# Altium PCB ant_amplifier.PcbDoc
Units mm, origin at the board's own origin, x right, y up, seen from the top; angles counter-clockwise.
Board outline 58 x 30 mm, 2 copper layers (Top Layer, Bottom Layer), stack 1.571 mm thick; 25 components, 15 nets, 77 pads, 201 vias.
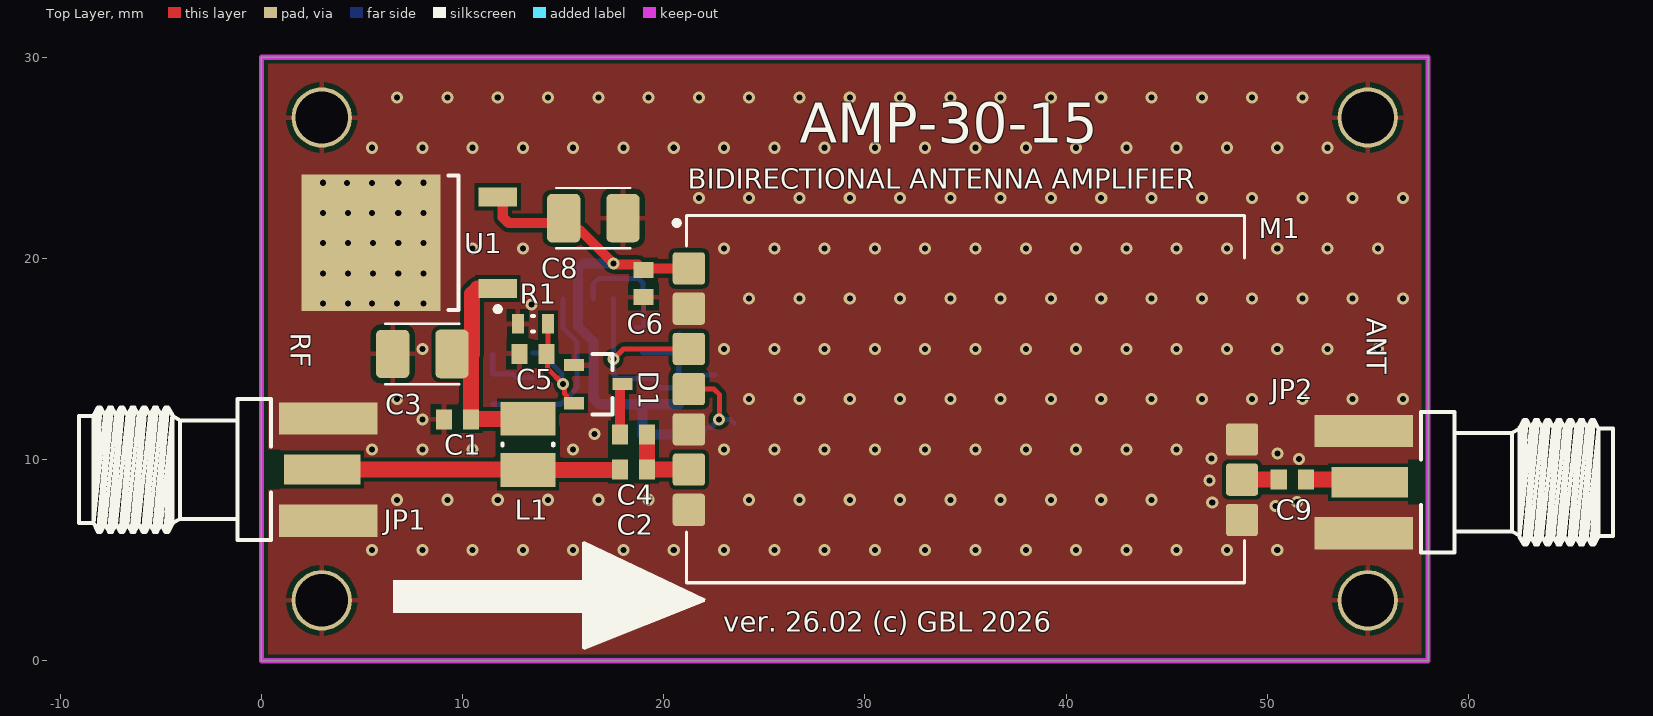
[diagram p0: Top Layer view]
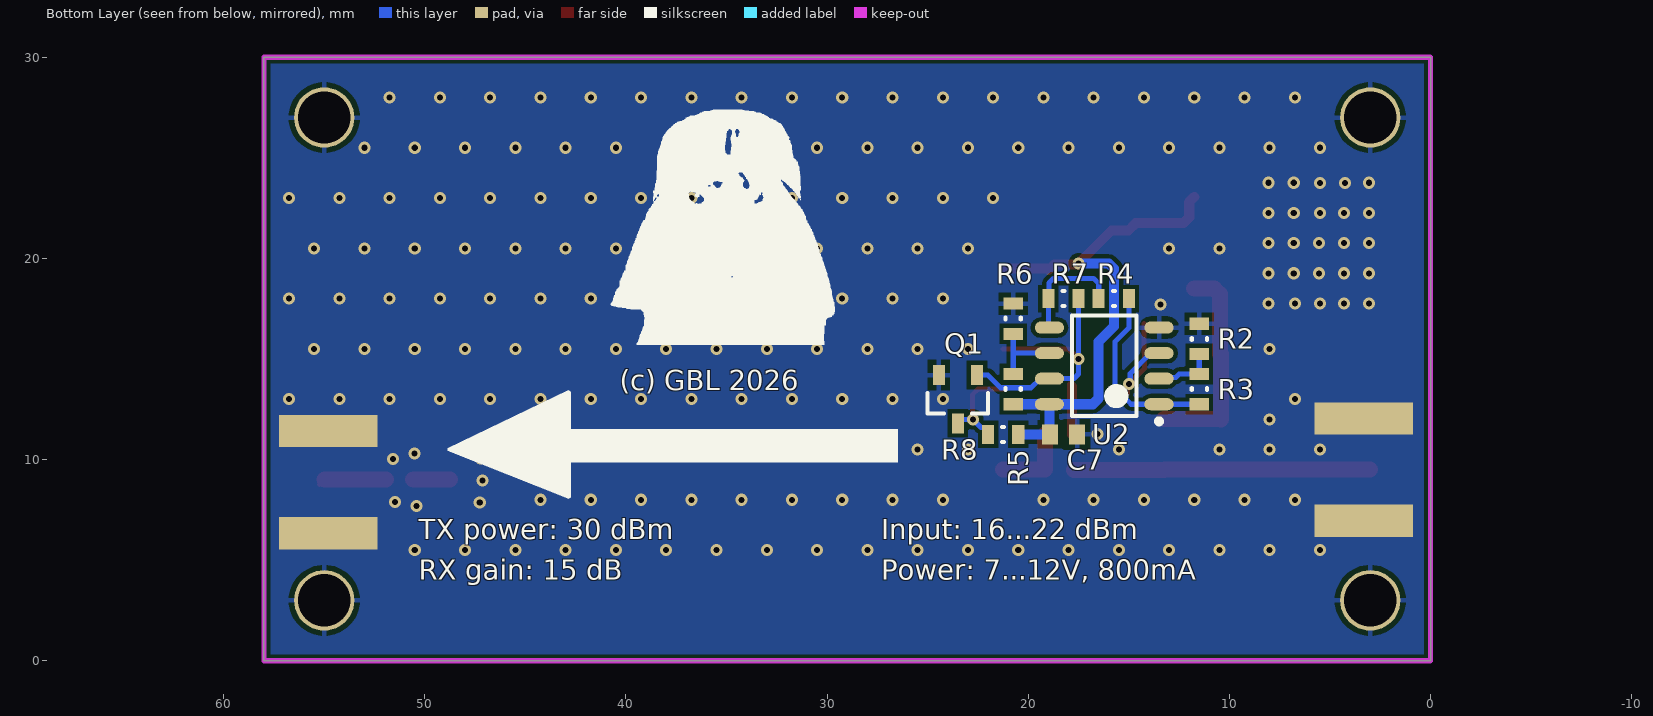
[diagram p1: Bottom Layer view, seen from below]
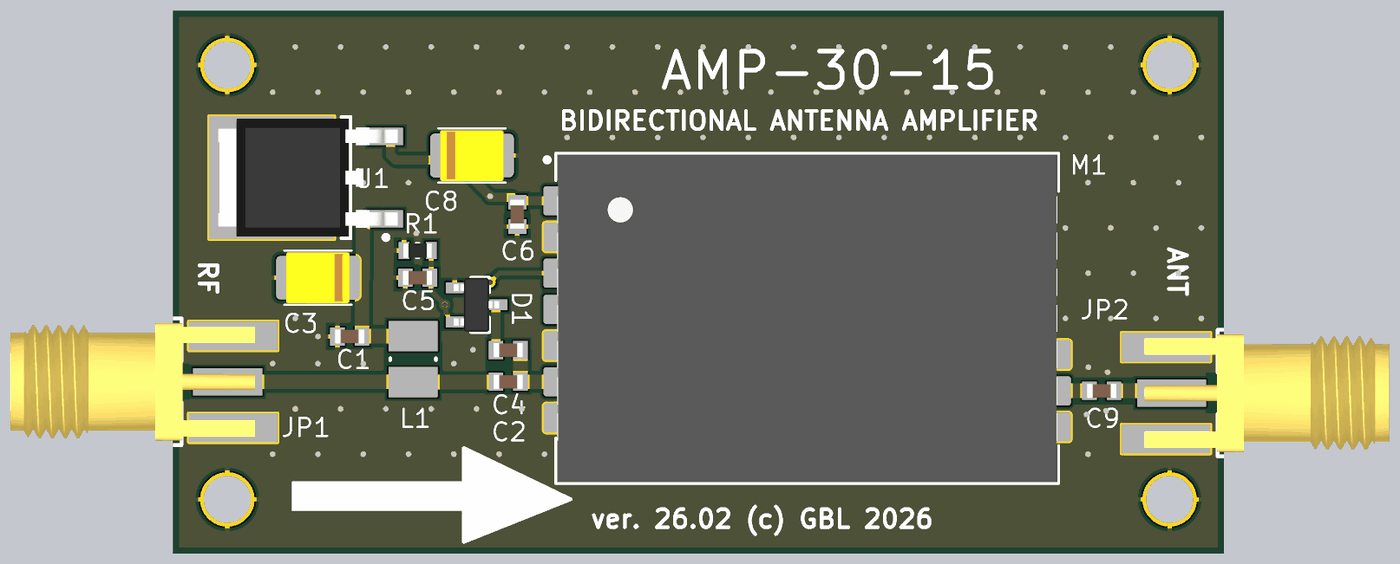
[diagram p2: 3D render of the assembled board from above, using the file's embedded part models]
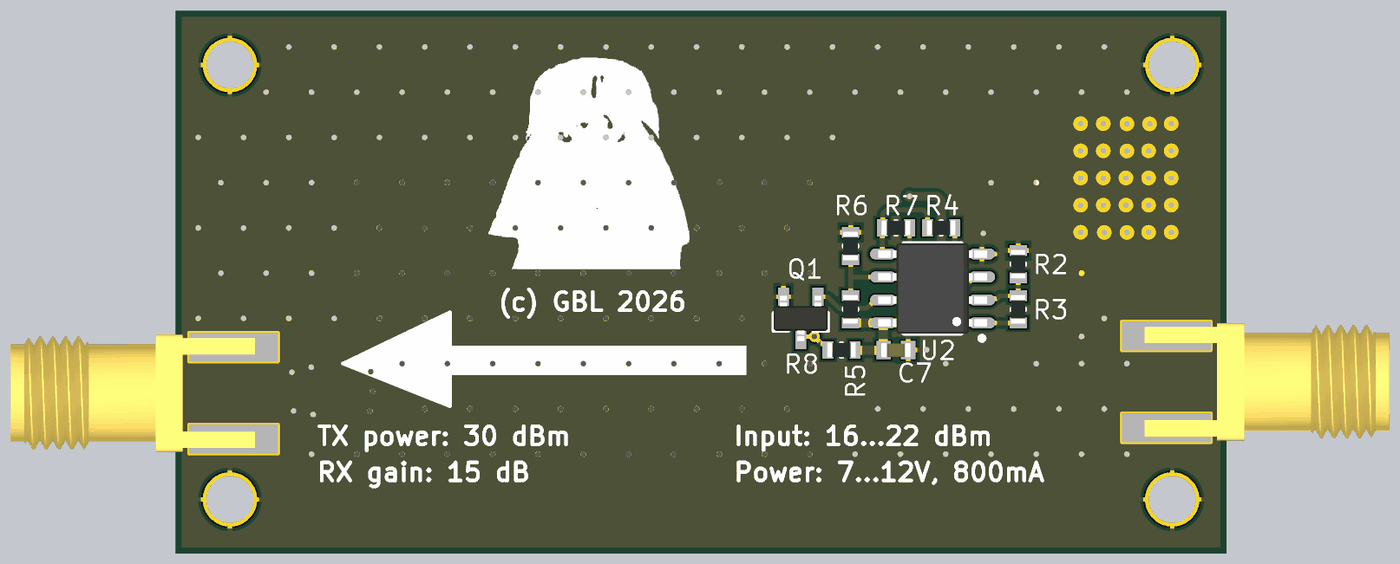
[diagram p3: 3D render of the assembled board from below, using the file's embedded part models]

## Layer stack, top to bottom
Top Solder: solder mask 0.0102, Solder Resist, Dk 3.5
Top Layer: signal copper 0.0356
Dielectric 1: dielectric 1.5, FR-4, Dk 4.8
Bottom Layer: signal copper 0.0356
Bottom Solder: solder mask 0.0102, Solder Resist, Dk 3.5

## Board outline
0,0 0,30 58,30 58,0

## Design rules (kind name [scope] priority, off if disabled: settings)
Clearance [All] p1: gap=0.2 ignorepadtopadclearanceinfootprint=FALSE
HoleSize [All] p1: absolutevalues=TRUE maxlimit=5 minlimit=0.025 maxpercent=80.000 minpercent=20.000
MinimumSolderMaskSliver [All] p1: minsoldermaskwidth=0.05
PolygonConnect PolygonConnect_3 [InComponent('JP1') or InComponent('JP2') vs IsNamedPolygon('GND_L02_P000')] p1: connectstyle=Direct reliefconductorwidth=0.254 reliefentries=4 polygonreliefangle="90 Angle" airgapwidth=0.254
PolygonConnect PolygonConnect_2 [InComponent('JP1') or InComponent('JP2') or InComponent('U1') or InComponent('M1') vs IsNamedPolygon('GND_L01_P001')] p2: connectstyle=Direct reliefconductorwidth=0.254 reliefentries=4 polygonreliefangle="90 Angle" airgapwidth=0.254
PolygonConnect PolygonConnect_1 [All vs IsNamedPolygon('GND_L01_P001') Or IsNamedPolygon('GND_L02_P000')] p3: thpad.connectstyle=Relief thpad.reliefconductorwidth=0.254 thpad.reliefentries=4 thpad.polygonreliefangle="90 Angle" thpad.airgapwidth=0.254 smdpad.connectstyle=Relief smdpad.reliefconductorwidth=0.254 smdpad.reliefentries=4 smdpad.polygonreliefangle="90 Angle" smdpad.airgapwidth=0.254 via.connectstyle=Direct via.reliefconductorwidth=0.254 via.reliefentries=4 via.polygonreliefangle="90 Angle" via.airgapwidth=0.254
PolygonConnect [All] p4: connectstyle=Relief reliefconductorwidth=0.254 reliefentries=4 polygonreliefangle="90 Angle" airgapwidth=0.254
RoutingVias [All] p1: holewidth=0.711 width=1.27 viastyle="Through Hole" minholewidth=0.711 minwidth=1.27 maxholewidth=0.711 maxwidth=1.27
SilkToSilkClearance [All] p1: silktosilkclearance=0.1
SilkToSolderMaskClearance [IsPad] p1: minsilkscreentomaskgap=0.05 clearancetoexposedcopper=TRUE
SolderMaskExpansion [All] p1: expansion=0.102 istentingtop=FALSE
Width [All] p1: maxlimit=2 minlimit=0.2 preferedwidth=0.25
26 further rules are at their usual default settings.

## Components (designator, comment, footprint, x,y, rotation, side; value= is the part's Value field where it differs from the comment)
C1 "1nF" C-0603 9.75,12 r0 top
C2 "100pF" C-0603 18.5,9.5 r0 top
C3 "22uF 16V" C_TANTAL_B 8,15.25 r180 top
C4 "1pF" C-0603 18.5,11.25 r180 top
C5 "1nF" C-0603 13.5,15.25 r180 top
C6 "100nF" C-0603 19,18.75 r270 top
C7 "1uF" C-0603 18.25,11.25 r180 bottom
C8 "22uF 16V" C_TANTAL_B 16.5,22 r0 top
C9 "100pF" C-0603 51.25,9 r0 top
D1 "BAT17-04" SOT-23 16.75,13.75 r0 top
JP1 "EM-SA071-GGT" SMA_F_EDGE 1.75,9.5 r0 top
JP2 "EM-SA071-GGT" SMA_F_EDGE 56.375,8.875 r180 top
L1 "L" L-1210 13.25,10.75 r90 top
M1 "E21-400G30S" E21 35,13 r270 top locked
Q1 "MMUN2211" SOT-23 23.5,13 r270 bottom
R1 "1k" R-0603 13.5,16.75 r0 top
R2 "10k" R-0603 11.5,16 r90 bottom
R3 "200k" R-0603 11.5,13.5 r90 bottom
R4 "100k" R-0603 15.75,18 r180 bottom
R5 "100k" R-0603 20.75,13.5 r90 bottom
R6 "22k" R-0603 20.75,17 r270 bottom
R7 "1M*" R-0603 18.25,18 r180 bottom
R8 "4k7" R-0603 21.25,11.25 r180 bottom
U1 "78M05" DPAK3 5.445,20.78 r180 top
U2 "LM2904DR" SO-8 16.225,14.655 r0 bottom

## Footprints (in the part's own frame and the unit in brackets; to place one, negate y for a bottom-side part, rotate by r counter-clockwise, add the part's x,y. Pads: shape width x height; smd on the part's side, far side on the other; paste and mask are expansions set on the pad)
C-0603 [mm] "Chip Capacitor, 2-Leads, Body 1,60x0,80mm, IPC Medium Density"
  rect 0.8x1 smd: 1(-0.675,0) 2(0.675,0)
  body extent -0.8,-0.4 0.8,0.4, height 0.8
C_TANTAL_B [mm] "Capacitor, Polarized, Molded Body; 3.50 mm L X 2.80 mm W X 2.10 mm H body"
  rrect30% 1.66x2.4 smd: 1(1.475,0)
  rrect30% 1.66x2.42 smd: 2(-1.475,0)
  silkscreen extent -1.85,-1.5 1.85,1.5, body extent -1.75,-1.4 1.75,1.4, height 2.1
DPAK3 [mm]
  rect 1.9x0.95 smd: 1(-6.305,2.28) 2(-6.305,-2.28)
  rect 6.9x6.8 smd: 3(-0.005,0)
  silkscreen extent -6.43,-3.35 -3.85,3.43, body extent -6.95,-3.25 2.95,3.25, height 2.32
E21 [mm] "Small Outline No-Lead (SON), 2.00 mm pitch; 14 pin, 18.00 mm L X 27.50 mm W X 3.00 mm H body"
  rrect18% 1.6x1.6 smd: 1(-6.5,-13.75) 2(-4.5,-13.75) 3(-2.5,-13.75) 4(-0.5,-13.75) 5(1.5,-13.75) 6(3.5,-13.75) 7(5.5,-13.75) 8(2,13.75) 9(4,13.75) 10(6,13.75)
  silkscreen extent -9.13,-14.48 9.13,13.87, body extent -9,-13.8 9,13.8, height 3
L-1210 [mm] "Chip Inductor, 2-Leads, Body 3,20x2,50mm, IPC Medium Density"
  rect 1.67x2.72 smd: 1(-1.27,0) 2(1.27,0)
  silkscreen extent -0.05,-1.26 0.05,1.26, body extent -1.75,-1.35 1.75,1.35, height 2.2
R-0603 [mm] "Chip Resistor, 2-Leads, Body 1,60x0,82mm, IPC Medium Density"
  rect 0.6x0.95 smd: 1(-0.75,0) 2(0.75,0)
  silkscreen extent -0.05,-0.38 0.05,0.38, body extent -0.8,-0.4 0.8,0.4, height 0.45
SMA_F_EDGE [mm] "SMA End Launch Jack for 1.58mm PCB, 50 Ohm, Flat Tab Contact"
  rect 3.81x1.5 smd: 1(1.27,0)
  rect 4.9x1.6 smd: 2(1.575,-2.54) 2(1.575,2.54)
  rect 4.9x1.6 smd far side: 2(1.575,-2.54) 2(1.575,2.54)
  silkscreen extent -10.81,-3.5 -1.28,3.5, body extent -10.73,-3.25 2.77,3.25, height 3.7
SO-8 [mm] "SOIC, 8-Leads, Body 4,90x3,90mm, Pitch 1,27mm, IPC Medium Density"
  oval 1.45x0.6 smd: 1(-2.725,1.905) 2(-2.725,0.635) 3(-2.725,-0.635) 4(-2.725,-1.905) 5(2.725,-1.905) 6(2.725,-0.635) 7(2.725,0.635) 8(2.725,1.905)
  silkscreen extent -2.85,-2.5 1.6,2.88, body extent -3,-2.5 3,2.5, height 1.75
SOT-23 [mm]
  rect 1x0.6 smd: 1(-1.2,0.95) 2(-1.2,-0.95) 3(1.2,0)
  silkscreen extent -0.3,-1.5 0.7,1.5, body extent -1.25,-1.5 1.25,1.5, height 1.2

## Part data
C1 C2 C4 C5 C6 C7 C9: library part CAPN, Voltage=50V, Вид=Конденсатор, Точність/група=NP0
C3 C8: library part CAPP, Voltage=16V, Вид=Конденсатор
JP1 JP2: library part SMA, "SMA Female R/A PCB Mount", Вид=Роз'єм
M1: library part E21
R1 R2 R3 R4 R5 R6 R7 R8: library part RES, Вид=Резистор, Точність/група=5%
U1: library part 78M08, Вид=Мікросхема
U2: library part LM2904, "Dual Operational Amplifiers, SOIC-8", Вид=Мікросхема
D1: Вид=Діод
L1: Вид=Індуктивність
Q1: Вид=Транзистор

## Free pads (board coordinates)
  round 3 hole 2.6: 1(3,3) 1(3,27) 1(55,3) 1(55,27)

## Via types
v1: diameter 0.6, hole 0.3, Top Layer to Bottom Layer, tented both sides, 174 vias
v2: diameter 0.6, hole 0.3, Top Layer to Bottom Layer, 27 vias

## Nets (pads, with @x,y where several pads share a name; then routed paths per layer and width w, separated by ;. In a path a pad name is that pad's centre, name@x,y a point inside that pad or via, vN(x,y) a via of type N, cw(c..) or ccw(c..) an arc to the next point about the centre after c; other vN are vias at no path point)
+5V: C6.1 C7.1 C8.2 M1.1 R5.1 R8.2 U1.2 U2.8 | length 27.5
  Top Layer w0.5: U1.2 12,22.81 12,22.043 12.293,21.75 14.663,21.75 15.025,21.388 15.862,21.388 v1(17.5,19.75) 17.552,19.698 18.727,19.698 C6.1 ; C6.1@19,19.5 M1.1
  Bottom Layer w0.5: v1(17.5,19.75) 16,19.75 15.75,19.5 15.75,16.619 16.5,15.869 16.5,13.043 16.793,12.75 U2.8 ; R8.2 C7.1 18.95,11.275 U2.8 ; R5.1 U2.8
+12V: C1.2 C3.2 L1.2 U1.1 | length 10.4
  Top Layer w0.254: C1.2 C1.2@10.445,12.02
  Top Layer w0.8: C1.2 10.425,15.25 ; C1.2@10.445,12.02 L1.2 ; 10.475,15.25 10.475,18.225 10.75,18.5 U1.1
GND: C1.1 C3.1 C5.2 C6.2 C7.2 C8.1 D1.1 JP1.2 JP2.2 M1.2 M1.5 M1.7 M1.8 M1.10 pad.1 Q1.2 R1.1 R2.2 R6.1 U1.3 U2.4
  other v1: 5.5,5.5 8,5.5 10.5,5.5 13,5.5 15.5,5.5 18,5.5 20.5,5.5 23,5.5 25.5,5.5 28,5.5 30.5,5.5 33,5.5 35.5,5.5 38,5.5 40.5,5.5 43,5.5 45.5,5.5 48,5.5 50.5,5.5 50.409,7.693 47.269,7.872 51.491,7.888 6.75,8 9.25,8 11.75,8 14.25,8 16.75,8 19.25,8 24.25,8 26.75,8 29.25,8 31.75,8 34.25,8 36.75,8 39.25,8 41.75,8 44.25,8 47.131,8.963 51.579,10.027 47.231,10.058 50.515,10.307 5.5,10.5 8,10.5 10.5,10.5 15.5,10.5 23,10.5 25.5,10.5 28,10.5 30.5,10.5 33,10.5 35.5,10.5 38,10.5 40.5,10.5 43,10.5 45.5,10.5 16.554,11.26 8,12 6.75,13 24.25,13 26.75,13 29.25,13 31.75,13 34.25,13 36.75,13 39.25,13 41.75,13 44.25,13 46.75,13 49.25,13 51.75,13 54.25,13 56.75,13 8,15.5 23,15.5 25.5,15.5 28,15.5 30.5,15.5 33,15.5 35.5,15.5 38,15.5 40.5,15.5 43,15.5 45.5,15.5 48,15.5 50.5,15.5 53,15.5 55.5,15.5 13.427,17.697 24.25,18 26.75,18 29.25,18 31.75,18 34.25,18 36.75,18 39.25,18 41.75,18 44.25,18 46.75,18 49.25,18 51.75,18 54.25,18 56.75,18 10.5,20.5 13,20.5 23,20.5 25.5,20.5 28,20.5 30.5,20.5 33,20.5 35.5,20.5 38,20.5 40.5,20.5 43,20.5 45.5,20.5 48,20.5 50.5,20.5 53,20.5 55.5,20.5 21.75,23 24.25,23 26.75,23 29.25,23 31.75,23 34.25,23 36.75,23 39.25,23 41.75,23 44.25,23 46.75,23 49.25,23 51.75,23 54.25,23 56.75,23 5.5,25.5 8,25.5 10.5,25.5 13,25.5 15.5,25.5 18,25.5 20.5,25.5 23,25.5 25.5,25.5 28,25.5 30.5,25.5 33,25.5 35.5,25.5 38,25.5 40.5,25.5 43,25.5 45.5,25.5 48,25.5 50.5,25.5 53,25.5 6.75,28 9.25,28 11.75,28 14.25,28 16.75,28 19.25,28 21.75,28 24.25,28 26.75,28 29.25,28 31.75,28 34.25,28 36.75,28 39.25,28 41.75,28 44.25,28 46.75,28 49.25,28 51.75,28
  other v2: 3.054,17.76 4.304,17.76 5.5,17.75 6.75,17.75 8.054,17.76 3.054,19.26 4.304,19.26 5.554,19.26 6.804,19.26 8.054,19.26 3.054,20.76 4.304,20.76 5.554,20.76 6.804,20.76 8.054,20.76 5.5,22.25 3.054,22.26 4.304,22.26 6.804,22.26 8.054,22.26 4.25,23.75 5.5,23.75 3.054,23.76 6.804,23.76 8.054,23.76
NetC2_1: C2.1 JP1.1 L1.1 | length 14.7
  Top Layer w0.254: L1.1@13.23,9.5 L1.1 ; C2.1@17.73,9.48 C2.1@17.75,9.5
  Top Layer w0.8: JP1.1 L1.1@13.23,9.5 ; L1.1 C2.1@17.73,9.48
NetC2_2: C2.2 C4.1 M1.6 | length 3.8
  Top Layer w0.8: C4.1 C2.2 M1.6
NetC4_2: C4.2 D1.3 | length 2.7
  Top Layer w0.25: D1.3@17.825,13.625 D1.3
  Top Layer w0.254: C4.2@17.7,11.375 C4.2
  Top Layer w0.5: C4.2 D1.3@17.825,13.625
NetC5_1: C5.1 D1.2 R1.2 U2.3 | length 7.1
  Top Layer w0.25: v1(15,13.75) 15.067,13.683 15.067,13.283 15.175,13.175 15.175,12.975 15.35,12.8 D1.2
  Top Layer w0.254: R1.2 14.25,15.325 C5.1 14.232,15.193 14.232,14.518 v1(15,13.75)
  Bottom Layer w0.254: U2.3 13.925,15.29 14.934,14.281 14.934,13.816 v1(15,13.75)
NetC9_1: C9.1 M1.9 | length 1.8
  Top Layer w0.8: M1.9 C9.1
NetC9_2: C9.2 JP2.1 | length 3.4
  Top Layer w0.254: JP2.1@54.98,9 JP2.1@55.23,8.75
  Top Layer w0.8: C9.2 JP2.1@54.98,9
NetR2_1: R2.1 R3.2 U2.2 | length 3.1
  Bottom Layer w0.254: R2.1 R3.2 12.5,14.25 12.664,14.086 13.434,14.086 U2.2
NetR3_1: R3.1 R4.2 U2.1 | length 9.2
  Bottom Layer w0.254: R3.1 14.887,12.75 15.681,13.544 15.681,15.872 15,16.553 R4.2
NetR4_1: R4.1 R7.1 U2.5 | length 6
  Bottom Layer w0.254: R4.1 16.5,18.75 16.75,19 18.75,19 18.979,18.771 R7.1@18.979,18 ; U2.5@18.619,16.56 U2.5 19,16.61 R7.1
NetR5_2: R5.2 R6.2 U2.6 | length 3.8
  Bottom Layer w0.254: U2.6 20.71,15.29 20.75,15.25 ; R5.2 20.75,15.25 ; R6.2 20.75,15.25
RXEN: M1.4 Q1.3 R8.1 | length 4.9
  Top Layer w0.254: M1.4 22.5,13.5 22.782,13.218 22.782,12.032 v2(22.75,12)
  Bottom Layer w0.254: R8.1 22,11.425 22.173,11.598 22.348,11.598 v2(22.75,12) 23.327,12 23.5,11.827 Q1.3
TXEN: M1.3 Q1.1 R7.2 U2.7 | length 13.3
  Top Layer w0.254: v2(17.5,15) 18,15.5 M1.3
  Bottom Layer w0.254: R7.2 17.5,14.25 17.73,14.02 19.411,14.02 19.862,13.569 21.383,13.569 22.014,14.2 Q1.1

## Polygon pours and split planes (outlines as drawn)
GND on Bottom Layer "GND_L02_P000" (solid, pour order 0): 0,0 0,30 58,30 58,0
GND on Top Layer "GND_L01_P001" (solid, pour order 1): 0,0 0,30 58,30 58,0
no net on Top Overlay (solid): 6.552,2.372 6.552,4 15.948,4 15.948,6 22.198,3 15.948,0.5 15.948,2.372
no net on Bottom Overlay (solid): 26.5,9.872 26.5,11.5 42.75,11.5 42.75,13.5 49,10.5 42.75,8 42.75,9.872

## Keep-outs
Keep-Out Layer:
  the board outline again, w0.254

## Other copper
Top Layer:
  pour cut-out: 57,7.75 58,7.75 58,10.012 57,10.012
  pour cut-out: 49.75,9.75 49.75,8.25 53,8.25 53,9.75
  pour cut-out: 17.225,11.95 17.225,8.8 19.775,8.8 19.775,11.95
  pour cut-out: 11.636,11.636 11.636,10.16 14.844,10.16 14.864,10.14 14.864,11.636 14.844,11.656
  pour cut-out: 0.5,10.5 0.504,10.504 0.861,10.504 0.861,8.496 0.857,8.5 0.25,8.5 0.25,10.5

## Silkscreen, mask and mechanical layers (free items; w line width, h text height)
Top Overlay:
  text "AMP-30-15" at 26.754,25.754 h2
  text "BIDIRECTIONAL ANTENNA AMPLIFIER" at 21.2,23.45 h1
  text "ANT" at 54.95,17.05 h1 r270
  text "RF" at 1.45,16.3 h1 r270
  text "ver. 26.02 (c) GBL 2026" at 22.95,1.45 h1
Bottom Overlay:
  region: 1139 vertices and 10 holes, not listed, extent 29.631,15.719 40.75,27.4
  text "(c) GBL 2026" at 40.3,13.45 h1
  text "Input: 16...22 dBm" at 27.3,6.033 h1
  text "TX power: 30 dBm" at 50.3,6.033 h1
  text "Power: 7...12V, 800mA" at 27.3,4.033 h1
  text "RX gain: 15 dB" at 50.3,4.033 h1